# EAGLE board untitled (EAGLE 9.6.2)

No outline drawn. Coordinates in mm, seen from the top.
Copper layers (1*16): Top 0.035mm / dielectric 1.5mm / Bottom 0.035mm
Design rules "default": minimum track width 6mil, minimum drill 0.35mm, track to track 6mil, track to pad 6mil, pad to pad 6mil, via to via 6mil, smd to smd 6mil, copper to edge 40mil, drill to drill 6mil, minimum pad ring 10mil, minimum via ring 8mil, stop-mask expansion 4mil, vias tented up to drill 0mil, thermal gap 10mil

## Footprints (pad centres in the part's own frame; a part is rotated, then mirrored left to right if it is on the bottom)
CRAA = drill 1.321 pad 3.15 octagon: + -25.4,-5.08; +@1 -25.4,5.08; - 25.4,0
CA4060 = drill 1.1 pad 2: 1 -10.16,0; 2 10.16,0
MCS10B = drill 1.016 pad 2.159 octagon: MP 0,0

## Placement (x,y rotation side)
E$1  [CRAA]  71.12,38.1 0 top
E$2  [CRAA]  69.85,21.59 180 top
E$3  [CA4060]  12.7,1.27 180 top
E$4  [CA4060]  12.7,8.89 180 top
E$5  [CA4060]  13.97,20.32 180 top
E$6  [MCS10B]  29.21,20.32 0 top
E$7  [MCS10B]  29.21,8.89 0 top
E$8  [MCS10B]  29.21,1.27 0 top
E$9  [MCS10B]  0,20.32 0 top
E$10  [MCS10B]  0,8.89 0 top
E$11  [MCS10B]  0,1.27 0 top

## Library data of the parts
E$1 E$2 = battery
E$3-E$5 = resistor-power
E$6-E$11 = solpad